# Altium PCB MiniPCBR2.PcbDoc (part 2 of 2)
Units mil, origin at the board's own origin, x right, y up, seen from the top; angles counter-clockwise.
Board outline 669.97 x 965.45 mil, 4 copper layers (Top Layer, GND, PWR, Bottom Layer), stack 30.2 mil thick; 95 components, 51 nets, 371 pads, 97 vias.
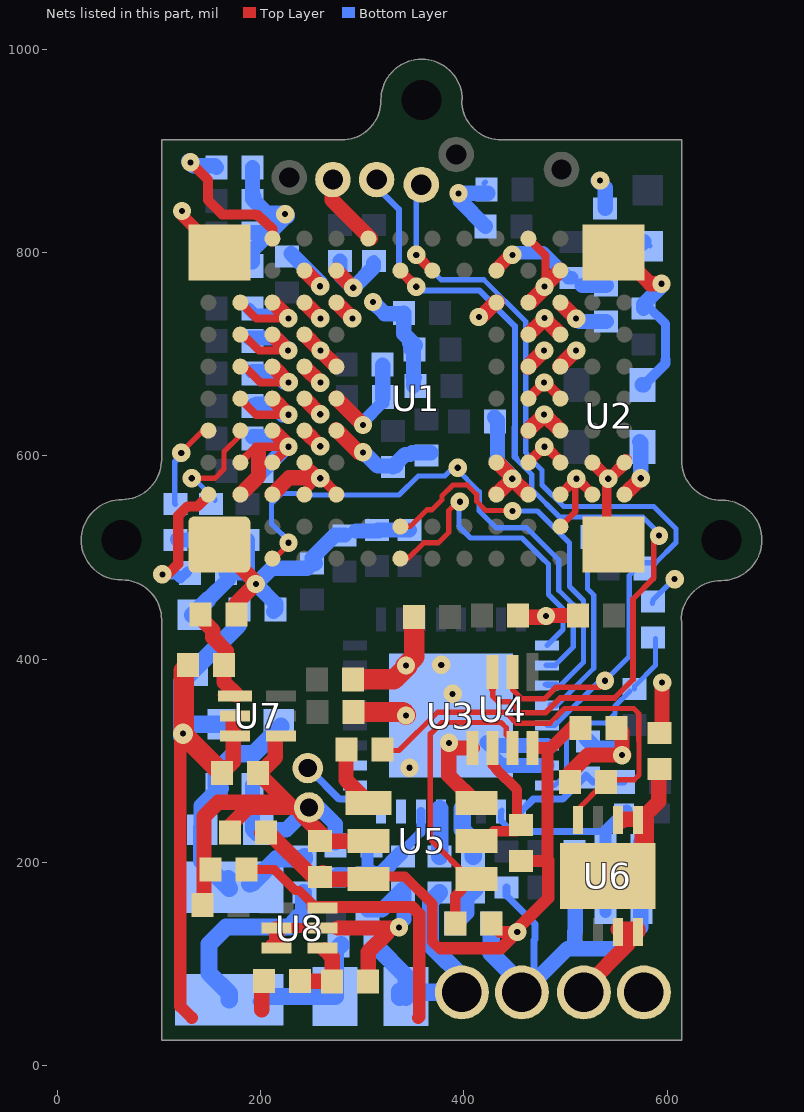
[diagram p4: the nets of this part, all layers, seen from the top]

## Via types
v1: diameter 18, hole 6, Top Layer to Bottom Layer, tented both sides, 96 vias
v2: diameter 20, hole 6, Top Layer to Bottom Layer, tented both sides, 1 vias

## Nets (pads, with @x,y where several pads share a name; then routed paths per layer and width w, separated by ;. In a path a pad name is that pad's centre, name@x,y a point inside that pad or via, vN(x,y) a via of type N, cw(c..) or ccw(c..) an arc to the next point about the centre after c; other vN are vias at no path point) (continued)
GND: C1.0 C2.0 C3.0 C4.0 C5.0 C6.0 C7.0 C8.0 C9.0 C10.0 C11.0 C12.0 C13.1 C14.1 C15.1 C16.1 C17.1 C18.1 C19.0 C20.1 C21.1 C22.1 C23.1 C24.1 C25.1 C26.1 C27.1 C28.1 C29.1 C30.1 C31.1 C32.1 C35.1 C36.0 C37.1 C38.1 C39.1 C40.1 C41.1 C42.0 C43.1 C44.1 C45.1 C46.0 C47.0 C48.0 C49.0 C50.0 C51.0 C52.1 C53.1 C54.1 C55.1 C56.1 C57.1 C58.0 C59.1 C60.1 C61.1 C62.1 J1.1 pad.1@271,872 pad.3@247.5,254 R2.1 R5.0 R11.0 R12.0 R15.0 U1.1-A1 U1.9-A11 U1.10-B3 U1.11-B4 U1.13-B6 U1.14-B7 U1.15-B8 U1.16-B9 U1.19-C3 U1.20-C4 U1.21-C5 U1.22-C6 U1.23-C7 U1.24-C8 U1.25-C9 U1.30-D3 U1.31-D4 U1.32-D5 U1.33-D6 U1.34-D7 U1.35-D8 U1.36-D9 U1.37-D10 U1.41-E3 U1.43-E5 U1.44-E6 U1.45-E7 U1.47-E9 U1.48-E10 U1.54-F11 U1.68-K3 U1.69-K4 U1.74-K9 U1.79-L3 U1.80-L4 U1.81-L5 U1.82-L6 U1.83-L7 U1.84-L8 U1.85-L9 U1.87-L11 U1.89-M2 U1.90-M3 U1.91-M4 U1.92-M5 U1.93-M6 U1.94-M7 U1.95-M8 U1.96-M9 U1.97-M10 U1.99-N3 U1.100-N4 U1.106-P1 U1.108-P4 U1.114-P11 U2.2 U3.6 U3.7 U3.33 U4.5 U5.2 U5.6 U7.4 U8.2 U8.3 U8.5 | length 5359.1
  Top Layer w5.12: U1.14-B7@179.89,687.65 U1.14-B7@179.89,687.99 ; U1.24-C8@211.38,719.49 U1.24-C8@212.22,719.49 ; v1@225.94,703.94 v1@226,704 ; U1.34-D7@242.88,687.83 U1.34-D7@242.88,687.99 ; v1@257.47,642.04 v1@258.81,642.04 ; v1@258.44,609.45 v1@258.66,609.45 ; U1.45-E7@274,687 U1.45-E7@274,688.37 ; U1.45-E7@274.37,687.99 U1.45-E7@275,687.99 ; v1@300.38,630.5 v1(300.5,630.5) ; v1@479.8,734.54 v1@479.8,736.98 ; v1@511.54,734.31 v1@512.56,734.31
  Top Layer w6: U1.89-M2@494.85,530.51 509.5,545.16 509.5,576.5 v1@509.5,581.2
  Top Layer w8: U1.1-A1@175.86,527.18 U1.1-A1@179.89,531.21 ; U1.11-B4@179,593 195,609 v1@227.32,609 ; U1.13-B6@179,657 195.47,640.53 v1(227.35,640.53) ; U1.16-B9@180,751 195.57,735.43 v1(227.17,735.43) ; U1.14-B7@182,690 199.56,672.44 v1(227.39,672.44) ; U1.15-B8@183,719 198.17,703.83 v1(226.89,703.83) ; U1.30-D3@242.88,562.01 242.88,564.48 v1@256.9,578.5 ; v1@446.9,577.06 v1@446.9,578.1 ; U1.87-L11@463.35,813.98 480.23,797.11 480.23,775.27 480,775.04 v1@480,769
  Top Layer w9: v1@542.2,578.5 542.2,576.45 540.47,574.72 540.47,519.35 U1.106-P1@547.01,512.8 ; U1.106-P1@545.8,514.5 U1.106-P1@565.42,494.88
  Top Layer w10: U8.3@209,119 215.62,119 U8.3@216,119 ; U1.20-C4@211.38,593.51 212,593.51 v1@229.57,611.08 ; U8.3@215.62,115.61 217,116.99 U8.2@217,135.3 ; U8.2@215.62,135.3 U8.2@217,135.3 ; U1.31-D4@242,595 242,594.5 258,578.5 v1(258.5,578) ; v1@259.4,578.5 274.37,563.53 U1.41-E3@274.37,562.01 ; 276,135 275.7,135.3 U8.5@260.9,135.3 U8.2@217,135.3 ; 325.5,130.7 325.93,130.27 ; U1.82-L6@463,656 463,656.38 v1(478.91,672.29) ; U1.80-L4@463.35,593.51 477,607.16 v1@477,609.5 ; v1(479.07,609.07) 480.93,609.07 U1.91-M4@496,594 ; v1@479.5,673 494.85,657.65 U1.93-M6@494.85,656.5 ; U1.90-M3@494.85,562.01 495.01,562.01 v1@509.5,576.5 ; U1.90-M3@495.5,563 U1.90-M3@495.5,563.5 ; v1(510.56,577.57) 511.43,577.57 U1.99-N3@527,562 ; U1.114-P11@546.8,800.2 U1.114-P11@547.01,800.2
  Top Layer w11.81: v1@120.95,842.07 120.95,838.47 U1.9-A11@159.22,800.2 ; U1.11-B4@179.89,593.34 U1.11-B4@179.89,593.51 ; U1.100-N4@526.34,593.51 v1@541.78,578.08 ; v1@543.1,577.6 559.5,594 U1.108-P4@559.5,596
  Top Layer w15: C46.0@141.8,155 143.98,157.18 143.98,245.08 158,259.1 219.1,259.1 ; U1.1-A1@159.51,511.07 195.09,475.49 v1@195.09,474.34 ; C39.1@169.63,229.6 169.63,235.98 187.65,254 ; C40.1@176.12,444 176.12,455.37 v1@195.09,474.34 ; U1.10-B3@179.89,562.01 197.84,579.96 197.84,605.29 ; 191.3,257.65 187.65,254 ; v1(195.09,473.99) v1@195.09,474.34 ; C41.1@197.22,288 C41.1@198.11,287.11 ; U1.23-C7@211,688 211.83,688 v1(227.39,672.44) ; U1.19-C3@211.38,562.01 227.87,578.5 256.9,578.5 258,578.5 259.4,578.5 v1@259.88,578.5 ; U1.21-C5@212,625 227.35,609.65 v1(227.35,609.03) ; U1.22-C6@212,656 212,655.89 v1(227.35,640.53) ; U1.24-C8@212,719 212,718.72 v1(226.89,703.83) ; U1.25-C9@212,751 227.17,735.83 v1(227.17,735.43) ; U7.4@214.34,320 214.34,303.34 C41.1@198.11,287.11 ; U8.3@215.62,119 215.62,133.62 216.99,134.99 U8.2@215.62,134.99 ; pad.3@239.7,247.7 264.98,222.42 C38.1@261.5,222.42 ; U1.35-D8@242.88,719.49 257.38,705 258,705 258,704.37 274,688.37 U1.45-E7@274.37,687.99 ; U1.32-D5@243,625 v1(258.5,609.5) ; U1.34-D7@243,687 243.71,687 v1(258.62,672.09) ; U1.36-D9@243,751 243.1,751 v1(258.66,735.44) ; U1.37-D10@243,782 243.52,782 v1(258.46,767.06) ; U1.33-D6@244,656 244,655.5 257.47,642.04 v1(258.5,641) ; pad.3@250,258 246,254 231.22,254 ; C38.1@267.4,220.2 268,220.8 U5.2@305.9,220.8 ; pad.1@271,872 270,852 U1.54-F11@308,814 ; U1.43-E5@274,626 296.5,603.5 v1(300.5,603.5) ; U1.44-E6@274,657 v1(300.5,630.5) ; U1.47-E9@274,751 274.59,751 v1(290.15,735.44) ; U1.48-E10@274,783 274,782.5 v1(291,765.5) ; 275.7,135.3 337.3,135.3 337.5,135.5 v1@337.5,136 ; C43.1@305.72,82.5 305.72,111.72 324.6,130.6 ; v1@385,317 385,285.4 U5.6@412.2,258.2 ; v1@385.2,312.6 U4.5@408.43,312.6 ; v1(414.66,736.72) 416.72,736.72 431.37,751.37 U1.74-K9@433,751.37 ; U1.68-K3@431,563 433,563 v1(447.5,577.5) U1.79-L3@463,562 ; U1.69-K4@431.85,593.51 432.89,593.51 v1@447.8,578.6 ; C6.0@453.02,441.3 482.3,441.3 484,443 C5.0@512.28,443 ; U1.81-L5@463,624 463,624.87 v1@478.13,640 ; U1.83-L7@463,687 463,687.87 v1(478.91,703.78) ; U1.84-L8@463.35,719.49 463.49,719.49 v1@477.5,733.5 ; U1.85-L9@463.35,750.99 464.99,750.99 v1@479.94,765.94 ; v1(478.86,640.73) v1@478.13,640 ; v1(479.23,766.65) 479.23,767.23 U1.97-M10@495,783 ; v1@481,734 481,733.35 U1.95-M8@494.85,719.49 ; U1.94-M7@494,688 509.78,703.78 v1(510.41,703.78) ; U1.92-M5@494.85,625 479.86,640 v1@478.13,640 ; U1.96-M9@495,751 495,750.55 v1(510.42,735.13) ; R11.0@504.48,279.1 504.48,288.11 522.12,305.75 v1@555.5,305.75 ; C37.1@549.52,334.4 555.5,328.42 v1@555.5,305.75 ; U1.114-P11@553.85,799 583.35,769.5 v1(594.5,769.5) ; v1@557.24,305.75 v1@555.5,305.75 ; v1(595,377) 595,330.04 R12.0@596.2,328.84 ; 187.65,254 231.22,254 ; C41.1@198.11,287.11 231.22,254
  Top Layer w20: C45.1@290.82,380.2 331.2,380.2 v1@344,393 ; C44.1@291.22,348 340,348 v1@343,345 ; v1@342,393 351.08,402.08 C36.0@351.08,441
  Bottom Layer w5: R5.0@585.59,454.87 R5.0@585.59,456.26 ; R5.0@586,456.72 586,458.15 v1@604.67,476.82
  Bottom Layer w5.12: v1@298,630 v1@300,630 ; C57.1@419.68,868.07 C57.1@421.12,869.5
  Bottom Layer w7: C27.1@442,167.36 469.9,139.46 469.9,124.25 469,123.35 469,91 J1.1@465,87
  Bottom Layer w8: v1@222.81,838.19 v1@223,838 ; v1@223.43,838 v1(224,838) ; C27.1@442,167.36 C27.1@442,175.28
  Bottom Layer w9: C58.0@580.88,747.47 598.5,729.85 598.5,694.79
  Bottom Layer w10: v1@257.5,608.5 v1(258.5,609.5) v1@259.45,610.45 ; v1@300,630 v1(300.5,630.5) ; v1@310,748.5 v1@310,754.5 ; C17.1@310.28,791.78 C17.1@311.5,793 ; C54.1@321.72,651.72 C54.1@321.72,660 ; U2.2@577.29,670.05 598.5,691.26 598.5,694.79
  Bottom Layer w11.81: C55.1@344.9,710.7 350.08,705.52 C55.1@350.48,705.12
  Bottom Layer w12: C50.0@188,745 193.79,739.21 223.39,739.21 v1(227.17,735.43) ; C49.0@191.72,649 191.72,650.72 C49.0@192,651 ; v1@300,633 320.32,653.32 C54.1@320.32,658.1
  Bottom Layer w15: C2.0@118,518 118.72,517.28 C3.0@151,517.28 ; C61.1@147.5,458 168,478.5 C1.0@168,485 ; C3.0@152,517 152.28,517.28 C47.0@187,517.28 187,483.02 185.02,485 C1.0@168,485 ; C1.0@165.72,485 C1.0@168,485 ; C11.0@189,716 214.72,716 226.86,703.86 v1@228,705 ; C8.0@190,820 208,820 224,836 v1(224,838) ; C60.1@191.72,276 191.72,232.28 C59.1@196,228 ; C48.0@191.72,791 191.72,802.42 v1@225.3,836 ; C12.0@191.72,853 205.72,839 v1@225,839 ; C4.0@191.72,884 191.72,856.28 C12.0@193,855 ; C9.0@192,619 209,619 v1@218.97,609.03 ; C51.0@192,683 213,683 223.56,672.44 v1(227.39,672.44) ; v1@192.15,473.31 v1@195.09,473.31 ; v1@194.05,475.13 v1(195.09,473.99) ; C49.0@196,651 211,651 221.47,640.53 v1(227.35,640.53) ; C59.1@197.5,232 225,232 pad.3@247,254 ; C7.0@201.72,585 225.83,609.11 v1@227.23,609.11 ; C62.1@212.64,446.92 C62.1@214.72,449 214.72,454.46 v1(195.09,473.99) ; v1@224.4,837.35 v1@225.95,835.8 ; v1@227.23,609.03 v1(227.35,609.03) ; C10.0@229.75,799.25 258.46,770.54 v1(258.46,767.06) ; pad.3@249,257 pad.3@250.28,255.72 ; C21.1@250.4,493.92 C21.1@250.4,494 ; C21.1@252.79,493.77 C21.1@253.5,494.48 ; pad.3@254,257 273.28,237.72 C32.1@273.28,219 ; C56.1@278,791.78 278,778 v1@292,764 ; C20.1@282.85,522.22 273.11,522.22 250.4,499.51 C21.1@250.4,494 ; v1(291,765.5) 311,785.5 C17.1@311,790 ; C20.1@293.58,526.15 C22.1@316.2,526.15 ; v1@299.4,631.4 v1@301.4,631.4 ; v1(300.5,603.5) 301.5,603.5 315,590 C13.1@330.72,590 ; C31.1@305,153.28 319.28,153.28 C30.1@339,173 ; v1(310.5,751.5) 322,740 C16.1@338,740 ; C22.1@315.22,527.12 C23.1@346.3,527.12 ; C15.1@319.72,689.3 320,689.02 C54.1@320,657 ; C13.1@330,589.28 C13.1@330.72,590 ; C13.1@332.86,590.04 332.82,590 C13.1@330.72,590 ; C16.1@340.78,740.7 340.78,720.22 C55.1@352,709 ; 341,144 C30.1@341,174 ; C55.1@348,705 350.28,702.72 C14.1@350.28,677.72 ; C14.1@350.08,677.92 C14.1@350.28,677.72 ; C55.1@350.08,705.52 C55.1@350.08,709.6 ; C14.1@350.28,669 C14.1@350.28,677.72 ; C14.1@351,677 C14.1@350.28,677.72 ; C52.1@367.33,603.23 348.83,603.23 346.99,601.39 342.11,601.39 C13.1@330.72,590 ; v1(394.5,858.5) v1@396,858.5 ; C18.1@421.28,826 396,851.28 v1@396,858.5 ; U3.33@423,318 426.06,314.94 U3.6@481.61,314.94 ; C57.1@423.5,858.5 v1@396,858.5 ; C53.1@430,638 432.92,635.08 432.92,596.7 431.67,595.45 448,579.12 v1@448,578 ; U3.33@431,301 436.74,295.26 U3.7@481.61,295.26 ; J1.1@456,77 J1.1@457,77 ; J1.1@469.42,82.58 501.85,115 553,115 574,136 C24.1@574,220 ; C28.1@508.72,210 509.5,209.22 509.5,132.09 508.72,131.31 508.72,120.28 512,117 ; v1@513.72,732.28 C19.0@540,732.28 ; C35.1@520,322 529.39,312.61 548.39,312.61 v1(555.5,305.5) ; v1@532,871 539,864 R15.0@539,843.72 ; U2.2@575.5,670.05 U2.2@577.29,670.05 ; C58.0@576.77,745.28 576.77,749.27 v1@595.5,768 ; v1(195.09,473.99) 210.46,489.36 245.76,489.36 C21.1@250.4,494
  Bottom Layer w17: C61.1@133,443.5 C61.1@147.5,458 ; R2.1@426.72,140 426.72,110.28 J1.1@457,80
  other v1: 336,136 346.35,293.08 385.2,317.6 342.91,344.49 388.85,365.84 342.91,393.7 377.63,394.41 480.8,442.5 607.38,478.69 542,577.5 258.76,703.75 479.23,735.65 122.5,841 534,871
HORISYNC: U1.55-G1 U3.1 | length 313.9
  Top Layer w5.12: U1.55-G1@337.37,499.02 344.89,499.02 360.32,514.46 374.63,514.46 384.93,524.76 384.93,546.33 v1@394.49,555.89
  Bottom Layer w5.12: v1@395.21,555.37 395.21,530.42 406.41,519.22 457.21,519.22 476.79,499.65 483.1,493.34 483.1,463.62 497.36,449.36 497.36,429.11 U3.1@481.61,413.37
  other v1: 395.92,554.94
NetC1_1: C1.1 U1.2-A3 | length 137.7
  Top Layer w7: U1.2-A3@146.88,560.5 U1.2-A3@148.39,562.01
  Top Layer w10: v1(103.1,483.42) 108.39,483.42 118.71,493.74 118.71,541.28 127.8,550.36 137.82,550.36 U1.2-A3@149.24,561.78
  Bottom Layer w10: v1(103.1,483.42) 116.8,483.42 120.88,479.34 C1.1@127.7,486.16
NetC2_1: C2.1 U1.4-A5 | length 92.1
  Top Layer w5.5: v1@120,602 143,625 U1.4-A5@148.39,625
  Bottom Layer w5.5: C2.1@116,552.72 115.32,553.4 115.32,594.32 v1@124,603
  other v1: 121.7,603
NetC3_1: C3.1 U1.12-B5 | length 106.9
  Top Layer w5.12: v1@133.08,578.08 154.78,578.08 163.83,587.12 163.83,604.3 179.89,620.37 U1.12-B5@179.89,625
  Bottom Layer w5.12: v1@136,576 155,557 C3.1@155,556
  other v1: 132.07,578
NetC4_1: C4.1 U1.27-C11 | length 164.5
  Top Layer w5.12: U1.27-C11@211.38,813.98 U1.27-C11@211.38,816.8
  Top Layer w10: v1(130.74,888.97) 148,871.71 148,851.76 162,837.76 193.87,837.76 194.64,837 197,837 211.38,823.62 U1.27-C11@211.38,813.98 211.38,811.38 U1.27-C11@211,811
  Bottom Layer w15: v1@129,890 133.5,885.5 154.78,885.5 C4.1@156.28,884
NetC19_1: C19.1 R1.0 U1.75-K10 | length 111.7
  Top Layer w13: U1.75-K10@431,783 445.9,797.9 v1(447.6,797.9)
  Bottom Layer w13: v1@451,800 477.82,800 502.53,775.28 R1.0@506,775.28
  Bottom Layer w15: R1.0@516.28,767.72 C19.1@540,767.72
NetC24_0: C24.0 C25.0 C26.0 L1.2 U3.10 | length 229
  Bottom Layer w5.12: U3.10@437.3,249.98 U3.10@437.3,251.3
  Bottom Layer w6: U3.10@436.34,249.98 436.34,241.62 447.79,230.17 468.17,230.17
  Bottom Layer w7: 465.11,230.31 539.28,230.31
  Bottom Layer w12: C26.0@539.28,151 C25.0@539.28,183 C24.0@539.28,216 539.28,230.28 L1.2@560,251
NetC30_0: C30.0 C31.0 C32.0 L2.1 U3.14 | length 159
  Bottom Layer w9: C31.0@307,190 C31.0@308.72,191.72 ; C30.0@339,211 357.6,229.6 U3.14@357.6,249.98
  Bottom Layer w12: L2.1@275.28,188.72 305,188.72 305,215 C32.0@310,220 ; C31.0@307,187 308.72,188.72 C31.0@308.72,191.72
  Bottom Layer w15: C31.0@305,188.72 308.72,188.72 317.72,188.72 C30.0@338,209
NetC33_0: C33.0 U3.13 | length 52.5
  Bottom Layer w10: 377.1,234.81 U3.13@377.1,238.8
  Bottom Layer w17: C33.0@376,205.72 376.02,252.47 376.23,252.69 U3.13@376.23,251.24
NetC33_1: C33.1 J1.0 L3.1 R16.0 | length 229.3
  Bottom Layer w17: R16.0@313,118 342.84,88.16 L3.1@342.84,68 L3.1@342.84,67 ; L3.1@336.84,67 L3.1@336.84,73.16 ; L3.1@344,75 347,72 J1.0@397.94,72 ; C33.1@376,170.28 366.96,161.24 366.96,119.04 J1.0@402,84
NetC34_0: C34.0 U3.12 | length 51.7
  Bottom Layer w17: U3.12@398.23,253 398.23,232.31 409,221.54 C34.0@409,205.72
NetC34_1: C34.1 R2.0 | length 42.2
  Bottom Layer w17: R2.0@391.28,140 402,150.72 402,165 C34.1@411,174
NetC35_0: C35.0 R3.1 U3.9 | length 119.3
  Bottom Layer w7: U3.9@456.02,249.98 468.19,262.15 496.95,262.15 C35.0@520.4,285.6 ; C35.0@520,286 C35.0@520.4,285.6 ; R3.1@557.28,279 527,279 C35.0@520.4,285.6
NetC40_0: C40.0 R13.0 U7.1 | length 91.4
  Top Layer w5: U7.1@160,364.5 172.68,364.5 U7.1@173,364.18
  Top Layer w15: C40.0@139,442 152.79,428.21 152.79,421.21 166,408 ; R13.0@163.72,393 163.72,377.28 U7.1@176,365
NetC43_0: C43.0 R14.0 U8.4 | length 68.1
  Top Layer w5: R14.0@238.72,85.5 R14.0@241.22,83
  Top Layer w10: R14.0@238.72,83 R14.0@241.22,83
  Top Layer w15: R14.0@241.22,83 C43.0@266,83 ; U8.4@263,114 270.28,106.72 C43.0@270.28,83 ; C43.0@270.28,82.5 C43.0@270.28,83 ; C43.0@273,83 C43.0@270.28,83
NetC59_0: C59.0 C60.0 L4.2 L5.1 R17.1 | length 299.8
  Bottom Layer w17: C59.0@142,234 142,201.31 L4.2@169,174.31 ; C59.0@142.5,232 142.5,255.5 C60.0@160,273 ; C60.0@156.28,276 156.28,289.28 174,307 193,307 L5.1@220,334 ; L4.2@164,180 L4.2@168,184 ; L4.2@189,179 L4.2@200.72,190.72 ; L4.2@192,180 215.5,203.5 243,203.5 R17.1@243,205.72
NetD1_C: D1.C R15.1 | length 55.9
  Bottom Layer w5.12: D1.C@572.72,817.28 D1.C@582,808 ; D1.C@578.72,809.28 D1.C@579,809 ; D1.C@580.72,808.78 D1.C@583,806.5
  Bottom Layer w15: R15.1@539,808.28 574.28,808.28 D1.C@577,811
NetJ2_1: J2.1 U6.7 U6.8 | length 100.7
  Top Layer w15: J2.1@518,76 562,120 562,124.93 U6.8@569.86,132.79 ; U6.7@551.7,134.14 568.52,134.14 U6.8@569.86,132.79 ; U6.8@571.12,131.54 U6.8@569.86,132.79 ; U6.8@571.21,134.14 U6.8@569.86,132.79
NetL3_2: L3.2 L4.1 R16.1 R17.0 | length 318.8
  Bottom Layer w10: L4.1@197,63 L4.1@201,67
  Bottom Layer w17: L4.1@169,64.69 169,71 149,91 149,119.42 166,136.42 228.14,136.42 236.04,144.33 236.04,145.04 242,151 R17.0@242,170 ; L4.1@202,68 L3.2@273.16,68 273.16,113.16 R16.1@279,119
NetR4_0: R4.0 R5.1 U3.8 | length 209.2
  Bottom Layer w5: U3.8@481.61,275.57 489.27,275.57 500.93,287.23 500.93,321.16 502.69,322.92 502.69,333.74 505.99,337.04 539.8,337.04 548.69,345.94 548.69,353.78 R4.0@563.55,368.64 ; R4.0@568,370.72 568,373.33 588.37,393.7 R5.1@588.37,420.16
NetR6_0: pad.3@358,867 R6.0 U1.60-H10 U3.5 U4.2 | length 918.6
  Top Layer w5.5: U4.2@447.8,387.4 447.8,369.98 456.83,360.95 479.1,360.95 490.44,372.29 v1@532.93,372.29
  Top Layer w10: v1(353.01,797.91) 369,781.93 U1.60-H10@369,780
  Bottom Layer w5.12: pad.3@351,867 353.01,864.99 v1(353.01,797.91) 377.5,773.43 419.5,773.43 460.7,732.23 460.7,603.27 462.08,601.89 462.08,600.65 476.83,585.9 476.83,571.48 498.19,550.12 586.82,550.12 608.57,528.37 608.57,514.65 588.75,494.83 R6.0@572.02,494.83 ; U3.5@481.61,334.63 489.35,334.63 535.25,380.53 v1@538.84,380.53 ; v1(538.84,378.69) 562.66,402.51 562.66,482.15 R6.0@572.02,491.51
NetR7_0: pad.2 R7.0 U1.56-G10 U3.4 U4.3 | length 1110.7
  Top Layer w5.12: U1.56-G10@337.37,782.48 U1.56-G10@338.52,782.48
  Top Layer w5.5: 428.11,370 428.11,363.89 433.97,358.03 444.9,358.03 455.73,347.2 480.2,347.2 494.79,361.79 548.22,361.79 566.33,379.9 566.33,459.35 586.8,479.82 v1@586.8,521.72
  Top Layer w7: 428.11,370 U4.3@428.11,387.4
  Top Layer w10: U1.56-G10@338,782 338,781.5 v1(353,766.5)
  Bottom Layer w5.12: 450.38,598.04 466.71,581.71 466.71,567.29 494,540 532,540 ; U3.4@484.65,355.12 U3.4@485.83,355.12 ; U3.4@485.23,354.01 490.74,354.01 527.71,390.98 527.71,463.27 521.71,469.27 R7.0@521.71,512.19 ; R7.0@522.48,515.84 R7.0@523.9,514.42 ; R7.0@525.28,524.51 525.28,533.28 532,540 ; R7.0@529,519 R7.0@529.74,518.26 ; v1@593.95,522 575.95,540 532,540
  Bottom Layer w6: pad.2@307,872 336,843 336,783 v1@352,767 ; v1(353,766.5) 356.63,762.87 415.13,762.87 450.14,727.86 450.14,628.68 449.94,628.47 449.94,599.1 451.52,597.52
  other v1: 592.01,521.51
NetR8_0: R8.0 U4.6 U5.5 | length 131.6
  Top Layer w5.91: U5.5@397.9,220.8 U5.5@412.2,220.8 ; U4.6@428.11,312.6 U4.6@428.11,314.77 ; U4.6@428.2,298.31 U4.6@428.2,310.4
  Top Layer w10: U4.6@428,296 431.89,292.11 431.89,291.72 452.3,271.32 452.3,243.7 R8.0@459,237 ; U5.5@429.3,230.6 451.88,230.6 R8.0@458,236.72
NetR9_0: R9.0 U4.7 U5.4 | length 324.8
  Top Layer w5.12: 378,337.6 436.44,337.6 441.58,332.46 441.58,325.22 U4.7@450.2,316.6 ; U4.7@447.4,300 U4.7@447.8,299.6 ; U4.7@447.43,326.77 448.43,326.77 U4.7@451.1,324.1 ; U4.7@447.8,312.6 U4.7@447.8,299.6 ; U4.7@448.2,299.2 U4.7@447.8,299.6
  Top Layer w5.5: 378,337.33 366.98,326.31 366.98,222.57 U5.4@406.16,183.4 ; R9.0@386.28,139 R9.0@386.28,139.6
  Top Layer w10: R9.0@391.43,139.6 391.43,166.63 U5.4@404.45,179.65
NetR10_0: R10.0 U5.1 | length 49.8
  Top Layer w15: R10.0@283.98,299.7 283.98,281.02 U5.1@306,259
NetR10_1: R10.1 R11.1 U6.4 | length 432.1
  Top Layer w5.12: R10.1@312,310 336.09,310 373.81,347.72 440.63,347.72 448.44,339.91 451.46,336.89 484.47,336.89 499.06,351.48 567.13,351.48 572.02,346.59 ; U6.4@512.06,241.78 512.06,252.27 R11.1@536.82,277.03 ; R11.1@538.72,275.12 544.9,281.3 567.5,281.3 572.3,286.1 572.3,319 572.01,319.29 572.01,346.29
NetR12_1: R12.1 U6.1 U6.2 U6.9 | length 183.6
  Top Layer w11.81: U6.9@549.84,187.12 U6.9@555.83,193.1 ; U6.9@566.5,201.5 U6.9@571.87,206.87 ; U6.1@572,244.5 U6.1@575,247.5 ; U6.9@580.5,192 581,192.5 581,242.5
  Top Layer w15: U6.2@556,241 557.5,242.5 U6.1@574.5,242.5 ; U6.1@574,242 U6.1@574.5,242.5 ; U6.9@576,210 575.18,210.82 575.18,242.5 U6.1@574.5,242.5 ; R12.1@592.82,294.15 591.8,293.13 591.8,259.8 U6.1@574.5,242.5
NetU1_107-P3: U1.107-P3 U2.3 | length 61.5
  Top Layer w7.87: U1.107-P3@557.84,562.01 U1.107-P3@558.01,562.01
  Top Layer w15: U1.107-P3@558.01,562.01 v1(574,578)
  Bottom Layer w7.87: v1@574,579.94 v1@575.59,578.35
  Bottom Layer w15: U2.3@573,614 574,613 574,579.94 v1(574,578)
NetU3_15: U3.15
NetU3_16: pad.3@246.16,292.75 U3.16 | length 91.2
  Bottom Layer w7: pad.3@249.2,295.7 249.2,290.26 277.31,262.15 291.52,262.15 303.68,249.98 U3.16@318.23,249.98
NetU3_17: U3.17
NetU3_18: U3.18
PIXCLK: U1.56-G2 U3.3 | length 401.3
  Top Layer w5.12: U1.56-G2@337.37,530.51 347.04,530.51 363.64,547.12 368.63,547.12 378.33,556.82 378.33,560.77 389.06,571.5 401.76,571.5 ; 402.67,571.61 412.48,561.8 412.48,555.37 421.48,546.37 v1@449.29,546.37
  Bottom Layer w5.12: v1(447.7,545.9) 472.34,545.9 503.88,514.36 503.88,471.46 517.6,457.74 ; U3.3@479.83,375.02 U3.3@490.37,375.02 ; U3.3@481.25,375.46 U3.3@490.81,375.46 ; U3.3@481.61,374 494.69,374 517.6,396.91 517.6,456.6
V5P0: C37.0 C38.0 C39.0 C41.0 C42.1 C61.0 C62.0 J2.0 L5.2 R8.1 R9.1 R13.1 R14.1 U4.8 U5.3 U7.2 U7.3 U8.6 | length 1606.9
  Top Layer w7: v1@455.1,130.3 v1@457.8,133
  Top Layer w9: C42.1@186,194 187.05,192.95 213.35,192.95 234,172.3 237.7,172.3 U8.6@252,158
  Top Layer w10: C38.0@261.9,189.9 C38.0@263.16,188.64 ; U5.3@301.85,185.9 341.95,185.9 368.7,159.15 368.7,122 376.55,114.15
  Top Layer w12: v2@120.76,324.81 120.76,58.24 132,47 ; U8.6@251,156 349,156 356,149 356,48 355,47 ; 377.2,115.45 436.35,115.45 v1(452.4,131.5) 435.5,131.5 R9.1@425,142 ; v1@451,133 483,165 483,202 482.28,201.28 ; R8.1@458,201.28 482.28,201.28 ; U4.8@467.49,312.6 482.28,312.6 ; C37.0@509.42,336.55 485.47,312.6 482.28,312.6 ; 482.28,201.28 482.28,312.6
  Top Layer w15: C41.0@161.78,288 161.78,287.78 173,299 U7.2@173,342 ; 201,55 201,81 R14.1@204,84 ; C39.0@201,229 C39.0@208.2,229 ; C39.0@205.3,231.9 C39.0@208.2,229 ; R14.1@205.5,87 R14.1@206.5,86 ; C39.0@209,229 C39.0@208.2,229 ; C38.0@258.45,186.78 250.42,186.78 C39.0@208.2,229 ; C38.0@260.9,189.9 260.9,184.1 261.6,183.4 U5.3@305.9,183.4
  Top Layer w20: v2@124.1,329.1 124.1,388.82 R13.1@128.28,393 ; v2@127.05,322.73 C41.0@161.78,288
  Bottom Layer w17: v2@122,324 122,377.5 C61.0@133,388.5 178,433.5 C62.0@178,451 ; 132,336 L5.2@162.5,336
  other v2: 123.5,326.65
VERTSYNC: U1.17-C1 U3.2 | length 547.3
  Top Layer w5.12: U1.17-C1@211.38,499.02 213.37,499.02 v1@225.86,511.51
  Bottom Layer w5.12: v1@230.19,513.76 210.62,533.33 210.62,553.26 220.32,562.96 239.23,562.96 240.75,561.44 336.11,561.44 354.91,580.24 368.63,580.24 381,580.24 v1@390,589.24 ; v1(393.87,588.39) 391.51,588.39 415.1,564.8 415.1,546.13 ; 416.19,544.58 431.43,529.34 461.4,529.34 480.98,509.77 493.21,497.55 493.21,467.81 507.48,453.55 507.48,411.81 496.56,400.89 489.73,394.06 U3.2@480.62,394.06 ; U3.2@481.61,393.68 U3.2@489.35,393.68
  other v1: 227.27,514.55
pads on no net: U1.18-C2 U1.26-C10 U1.49-E11 U1.53-F10 U1.61-H11 U1.65-J11 U1.76-K11 U1.77-L1 U1.78-L2 U1.86-L10 U1.101-N5 U1.102-N6 U1.103-N7 U1.104-N8 U1.105-N9 U1.109-P5 U1.110-P6 U1.111-P7 U1.112-P8 U1.113-P9 U6.3 U6.5 U6.6
copper on no net: | length 41.5
  Top Layer w5.12: 368.86,813.98 383.15,799.7 v1@383.15,798.08 ; v1@449.36,768.68 449.55,768.68 463.35,782.48
  other v1: 448.8,768.45 384.69,798.01

## Polygon pours and split planes (outlines as drawn)
"1.8V VDD" on PWR "1.8V" (solid, remove dead copper, pour order 140): 595.9,901.5 605.6,891.8 605.1,891.3 605.1,575.6 628.1,552.6 628.1,481.8 607.6,461.3 607.6,110.6 605.8,108.8 586.6,108.8 559.8,135.6 342.3,135.6 325.4,118.7 161.2,99 161.2,142.6 161.2,294.1 169.5,302.4 346.4,302.4 346.4,570.1 436.9,570.3 507.1,640.5 507.1,844.8 472.9,879 472.9,901.5
"1.2V VDD" on PWR "1.2V" (solid, remove dead copper, pour order 130): 209,308.5 336.1,308.5 336.1,495.15 336.1,501 336.1,580 326,580 376.21,580 497.22,633.4 497.22,833.78 457.5,902.5 414,902.5 396.5,920 323.5,920 300.5,897 242,897 242,819.5 241.5,819 175,819 175,395.5 209,395.5
"2.9V VDD" on PWR "2.9V" (solid, remove dead copper, pour order 128): 110,347.5 204.5,347.5 204.5,392.5 168,392.5 167.5,393 167.5,823 237.5,823 237.5,905 108.5,905 108,904.5 109.5,903 109.5,575 107.5,575 87,554.5 87,481.5 88,481.5 111,458.5 110,457.5
V5P0 on PWR "5V" (solid, remove dead copper, pour order 114): 157.5,345 157.5,93.54 328.47,111.29 364.5,130.15 560.07,130.15 610.97,44 110,44 109.5,44.5 109.5,345
GND on GND "GND" (solid, remove dead copper, pour order 108): 303,906 328,931 393,931 418,906 598,906 609,895 609,574 630,553 630,480 609,459 609,44 108,44 108,457 85,480 85,555 107,577 107,906

## Keep-outs
Keep-Out Layer:
  lines w1: 191,906 303,906 360.5,963.5 418,906 598,906 609,895 609,593 609,576 616.25,568.75 624.75,560.25 630,555 630,480 610,460 610,30 108,30 108,457 85,480 85,555 102,572 107,577 107,905.82 194.82,905.82 195,906

## Other copper
Top Layer:
  region net GND: 592,569.5 602,559.5 602,536.5 562,536.5 562,539.5
  region net GND: 525,895 600,895 603,892 603,574 603,537 597,537 585,603.26 585,835 525,835
  region net V5P0: 115,60 115,37 361,37 361,60

## Silkscreen, mask and mechanical layers (free items; w line width, h text height)
Top Overlay:
  circle w5: c575.93,268.19 r3
  circle w10: c487.83,396.38 r4.47
  circle w10: c101.6,507.3 r5.86
  circle w10: c120.5,245 r3.49
  circle w10: c121,83 r4.47
  circle w10: c601,898 r4.24
  circle w10: c144,365 r0.5
  lines w5: 140,382 152,382 ; 142,408 154,408 ; 152,431.1 164,431.1 ; 154,171 166,171 ; 154.2,456.9 166.2,456.9 ; 155,145 167,145 ; 161,206 173,206 ; 162,180 174,180 ; 173,275 185,275 ; 173,300.5 185,300.5 ; 181,218 193,218 ; 181,243 193,243 ; 214.5,94.9 226.5,94.9 ; 215,70.9 227,70.9 ; 246.7,197.8 246.7,209.8 ; 266.5,393.5 278.5,393.5 ; 267,368 279,368 ; 267.5,360.2 279.5,360.2 ; 267.5,391.2 279.5,391.2 ; 268,336.1 280,336.1 ; 268.5,368.2 280.5,368.2 ; 271.7,198.8 271.7,210.8 ; 282,70.4 294,70.4 ; 282.5,94.4 294.5,94.4 ; 296,324.1 308,324.1 ; 297,298.1 309,298.1 ; 362,428 374,428 ; 362,455 374,455 ; 373.25,39.78 384.35,39.78 ; 379.25,32.38 379.25,47.28 ; 403.5,152.9 415.5,152.9 ; 404,127.9 416,127.9 ; 427,429 439,429 ; 429,454 441,454 ; 445.2,213.3 445.2,225.3 ; 467.4,34.32 478,34.32 ; 471.2,213.3 471.2,225.3 ; 484.9,28 484.9,101.6 ; 491.2,34.2 501.8,34.2 ; 516.3,292.4 528.3,292.4 ; 517.3,266.4 529.3,266.4 ; 525,431 537,431 ; 525,455 537,455 ; 526.79,319.02 538.79,319.02 ; 526.78,345.29 538.78,345.29 ; 579.15,307.22 579.15,319.22 ; 593.5,40.2 604.6,40.2 ; 599.5,32.8 599.5,47.7 ; 605.2,305.63 605.2,317.63 ; 610.6,102.5 610.6,42.9 610.8,42.7 ; 611,29 611,43
  text "3" at 108.97,876.63 h25
  text "G" at 133.02,877.11 h25
  text "1.2" at 406.28,874.7 h25
  text "1.8" at 524.16,871.34 h25
  text "C" at 158.52,859.31 h25
  text "D" at 184.02,859.31 h25
  text "G" at 209.27,248.93 h25
  text "DATA" at 364.09,36.39 h25 r90
  text "IMR2-6/18" at 111,31 h25
  text "LED" at 514.25,30.47 h25
Bottom Overlay:
  lines w5: 102.35,529.3 102.35,541.3 ; 128.35,529.3 128.35,541.3 ; 137.35,529.3 137.35,541.3 ; 140,366.2 152,366.2 ; 141.65,498.44 153.65,498.44 ; 142.65,472.28 154.65,472.28 ; 164.35,529.3 164.35,541.3 ; 167,668.9 179,668.9 ; 167.05,758.8 179.05,758.8 ; 167.6,661.75 179.6,661.75 ; 167.9,693.85 179.9,693.85 ; 167.9,799.45 179.9,799.45 ; 168,263 180,263 ; 168,700.3 180,700.3 ; 168.05,733.8 180.05,733.8 ; 168.05,773.8 180.05,773.8 ; 168.05,807.55 180.05,807.55 ; 168.5,832.55 180.5,832.55 ; 168.5,897.05 180.5,897.05 ; 168.65,871.45 180.65,871.45 ; 168.7,839 180.7,839 ; 168.75,635.95 180.75,635.95 ; 168.95,865.65 180.95,865.65 ; 169,289 181,289 ; 169.05,629.8 181.05,629.8 ; 169.1,725.5 181.1,725.5 ; 169.4,603.8 181.4,603.8 ; 173.35,529.3 173.35,541.3 ; 178.52,572.24 190.52,572.24 ; 179,597.5 191,597.5 ; 191.65,436.3 203.65,436.3 ; 191.65,462.3 203.65,462.3 ; 200.35,528.3 200.35,540.3 ; 213.25,773.65 213.25,785.65 ; 229.5,181.5 229.5,193.5 ; 237.05,469.7 237.05,481.7 ; 239.55,773.2 239.55,785.2 ; 256,180.5 256,192.5 ; 263.01,162.46 263.01,174.46 ; 263.4,469.75 263.4,481.75 ; 264.5,804.4 264.5,816.4 ; 269.4,499.3 269.4,511.3 ; 285.22,203.21 297.22,203.21 ; 285.24,162.19 285.24,174.19 ; 285.78,229.88 297.78,229.88 ; 287.5,131 300.5,131 ; 288,105 301,105 ; 290.5,803.5 290.5,815.5 ; 291.5,163.21 291.5,175.21 ; 295,498.9 295,510.9 ; 296.65,677.35 308.65,677.35 ; 296.95,671.5 308.95,671.5 ; 297,702.5 309,702.5 ; 297.85,645.3 309.85,645.3 ; 299,38 318,38 ; 299,98 318,98 ; 299.5,803 299.5,815 ; 302.15,504.25 302.15,516.25 ; 317.75,600.3 317.75,612.3 ; 318.5,162.71 318.5,174.71 ; 324,804 324,816 ; 326.5,183 326.5,195 ; 326.85,503.8 326.85,515.8 ; 334,502.9 334,514.9 ; 342.7,600.5 342.7,612.5 ; 350.45,612.55 350.45,624.55 ; 353,753.2 365,753.2 ; 353.5,182 353.5,194 ; 353.6,727.8 365.6,727.8 ; 358.95,503.6 358.95,515.6 ; 363,181.5 363,193.5 ; 363.65,718.25 375.65,718.25 ; 364.05,656.3 376.05,656.3 ; 364.25,692.6 376.25,692.6 ; 364.95,682.2 376.95,682.2 ; 372.55,41.98 383.65,41.98 ; 376.1,611.65 376.1,623.65 ; 378.55,34.58 378.55,49.48 ; 389.5,183 389.5,195 ; 396.5,182 396.5,194 ; 401.97,152.59 413.97,152.59 ; 402.44,127.65 414.44,127.65 ; 407.05,620.9 419.05,620.9 ; 407.25,646.95 419.25,646.95 ; 422.5,182.5 422.5,194.5 ; 429.5,187.5 429.5,199.5 ; 433.15,813.05 445.15,813.05 ; 434.5,838.9 446.5,838.9 ; 435.6,849.15 447.6,849.15 ; 435.6,874.35 447.6,874.35 ; 455.5,188.5 455.5,200.5 ; 466.4,41 477,41 ; 484.8,162.4 496.8,162.4 ; 485.2,42.6 485.2,102.4 485.8,102.4 486.1,102.7 611,102.7 611,43 610.6,42.6 ; 485.8,188.4 497.8,188.4 ; 485.8,197.4 497.8,197.4 ; 485.8,222.4 497.8,222.4 ; 493.15,786.6 493.15,798.6 ; 509.25,295.4 509.25,307.4 ; 511.1,38.5 521.7,38.5 ; 519.4,787.95 519.4,799.95 ; 525,820 525,832 ; 527.2,744.3 527.2,756.3 ; 534.7,294.9 534.7,306.9 ; 535.35,533.1 547.35,533.1 ; 536.65,507.3 548.65,507.3 ; 550.8,196.4 562.8,196.4 ; 550.8,203.4 562.8,203.4 ; 550.8,229.4 562.8,229.4 ; 551,170 563,170 ; 551.8,138.4 563.8,138.4 ; 552,164 564,164 ; 552.3,820.5 552.3,832.5 ; 553.05,742.5 553.05,754.5 ; 553.35,502.1 565.35,502.1 ; 554.35,477.1 566.35,477.1 ; 555,347 555,359 ; 555.32,897.37 566.42,897.37 ; 561.32,889.97 561.32,904.87 ; 565,722.5 565,734.5 ; 568.8,259.4 580.8,259.4 ; 568.8,266.4 580.8,266.4 ; 568.8,292.4 580.8,292.4 ; 569.8,237.4 581.8,237.4 ; 573.7,435.2 573.7,447.2 ; 581,349 581,361 ; 589,722 589,734 ; 594.05,41.63 605.15,41.63 ; 599.2,433.7 599.2,445.7 ; 600.05,34.23 600.05,49.13
  text "1.2" at 358.66,904.53 h20
  text "1.8" at 472.68,881.44 h25
  text "SCL" at 360.59,839.59 h25 r90
  text "SDA" at 396.26,838.16 h25 r90
  text "3" at 230.36,823.03 h25
  text "G" at 256.55,822.44 h25
  text "IMR2-6/18" at 604.5,544.2 h25
  text "LED" at 580.79,108.18 h25
  text "DATA" at 460.88,101.78 h20
M1 Board Outline:
  lines w0: 62.32,477.95 cw(c62.32,516.98) 23.28,516.98 cw(c63.33,516.98) 63.33,557.03 ; 63.33,477.95 cw(c63.33,438.92) 102.36,438.92 ; 63.5,557.03 ccw(c62.93,596.46) 102.36,596.46 ; 279.53,911.02 ccw(c279.53,949.71) 318.21,949.71 ; 318.21,950.39 cw(c358.27,950.39) 358.27,990.45 cw(c358.27,950.4) 398.32,950.4 ; 397.64,950.39 ccw(c437.01,950.39) 437.01,911.02 ; 614.17,437.42 ccw(c613.01,437.42) 613.84,438.24 cw(c652.86,438.24) 652.86,477.27 ; 614.17,595.72 ccw(c653.54,595.72) 653.54,556.35 ; 653.2,477.27 ccw(c653.2,517.32) 693.25,517.32 ccw(c654.22,517.32) 654.22,556.35 ; 437.01,911.02 ccw(c437.01,911.02) 437.01,911.02 ; 437.01,911.02 ccw(c437.01,911.02) 437.01,911.02
  lines w0.5: 62.32,477.95 63.33,477.95 ; 63.33,557.03 63.67,557.03 ; 102.36,438.58 102.36,261.41 102.36,25 614.17,25 614.17,39.41 614.17,261.42 614.17,437.42 ; 102.36,596.4 102.36,911.02 279.53,911.02 ; 318.21,949.71 318.21,950.39 ; 398.32,949.71 398.32,950.39 ; 614.17,595.72 614.17,911.02 437.01,911.02 ; 652.86,477.27 653.2,477.27 ; 653.54,556.35 654.22,556.35 ; 398.32,950.39 398.32,950.4 ; 437.01,911.02 437.01,911.02 ; 437.01,911.02 437.01,911.02
M2 Board Dimensions:
  lines w10: -77.29,515.58 22.71,516.06 ; -37.39,535.77 22.71,516.06 ; -37.19,495.77 22.71,516.06 ; 22.66,526.06 22.76,506.06 ; 336.37,85.65 356.18,25.59 ; 338.99,928.39 359.18,988.33 ; 346.18,25.62 366.18,25.56 ; 349.18,988.36 369.18,988.3 ; 356.54,141.08 356.18,25.59 ; 358.82,872.85 359.18,988.33 ; 376.37,85.53 356.18,25.59 ; 378.99,928.27 359.18,988.33 ; 694.68,529.3 694.78,509.3 ; 754.63,539.59 694.73,519.3 ; 754.83,499.59 694.73,519.3 ; 794.73,519.78 694.73,519.3
  text "672.028 (mil)" at 3.53,372 h60 r0.28
  text "962.745 (mil)" at 392.56,150.96 h60 r89.82
M5 Assembly Top:
  text "PIN 1" at 139.92,510.29 h10
  text "C40" at 131.14,433.75 h20
  text "C5" at 517.11,432.95 h20
  text "C36" at 344.21,431.71 h20
  text "C6" at 418.13,432.33 h20
  text "PIN 1" at 464.31,407.07 h10 r270
  text "R13" at 122.5,382.5 h20
  text "C45" at 248.77,368.87 h20
  text "PIN 1" at 155.46,359.3 h10
  text "C44" at 249.5,337 h20
  text "C37" at 508.73,322.74 h20
  text "R10" at 277.26,300.96 h20
  text "R12" at 601.72,285.28 h20 r90
  text "C43" at 152.5,277.5 h20
  text "R11" at 497.24,269.09 h20
  text "PIN 1" at 286.5,253.36 h10
  text "PIN 1" at 582.55,226.09 h10 r90
  text "C39" at 161.46,219.42 h20
  text "R8" at 469.16,202.13 h20 r90
  text "C42" at 141.14,183.34 h20
  text "PIN 1" at 196.62,150.29 h10
  text "C46" at 136.3,147.57 h20
  text "R9" at 394.89,129.08 h20
  text "R14" at 197.5,73.5 h20
  text "C43" at 262.5,71.5 h20
M6 Assembly Bottom:
  text "C4" at 156.65,873.95 h20
  text "C57" at 416.1,851.8 h20
  text "C12" at 150.42,841.74 h20
  text "D1" at 588.5,821.5 h20 r90
  text "C18" at 416.71,815.42 h20
  text "C8" at 158.82,808.76 h20
  text "R15" at 548.28,799.05 h20 r90
  text "R1" at 515.54,787.23 h20 r90
  text "C56" at 289.41,785.16 h20 r90
  text "C17" at 320.28,783.51 h20 r90
  text "C48" at 150.73,775.78 h20
  text "C10" at 237.87,753.19 h20 r90
  text "C50" at 148.09,736.27 h20
  text "C16" at 332.68,731.97 h20
  text "C19" at 549.79,726.59 h20 r90
  text "C11" at 153.07,703.29 h20
  text "C58" at 585.6,699.8 h20 r90
  text "C55" at 343,693.5 h20
  text "PIN 1" at 504.09,687.62 h10 r270
  text "C15" at 277.5,678.5 h20
  text "C51" at 150.42,673.88 h20
  text "C14" at 344.25,659.76 h20
  text "C54" at 272.5,646.93 h20
  text "C49" at 147.47,641.84 h20
  text "U2" at 550,627.3 h20 r90
  text "C53" at 389.45,622.55 h20
  text "C9" at 155.25,607.46 h20
  text "C52" at 374.29,592.24 h20 r90
  text "C13" at 338.46,579.84 h20 r90
  text "C7" at 168.47,574.48 h20
  text "C3" at 160.38,520.03 h20 r90
  text "C2" at 125.69,517.23 h20 r90
  text "C47" at 197.56,513.34 h20 r90
  text "R7" at 529.64,509.39 h20
  text "C23" at 355.83,483.11 h20 r90
  text "C22" at 324.69,482.28 h20 r90
  text "C20" at 292.16,478.97 h20 r90
  text "R6" at 542.92,477.57 h20
  text "C1" at 134.09,475.07 h20
  text "C21" at 259.64,453.06 h20 r90
  text "C62" at 172.2,438.35 h20
  text "R5" at 595.03,425.71 h20 r90
  text "PIN 1" at 461.43,409.87 h10
  text "C61" at 145.76,394.95 h20 r90
  text "R4" at 577.24,338.77 h20 r90
  text "L5" at 175.78,328.21 h20
  text "C35" at 530.88,276.38 h20 r90
  text "R3" at 557.94,268.86 h20
  text "C60" at 149.33,265.67 h20
  text "L1" at 564.71,238.8 h20
  text "C59" at 151.67,222.43 h20
  text "C24" at 531.64,207.23 h20
  text "C32" at 265.56,206.48 h20
  text "C28" at 465.5,200.47 h20
  text "C25" at 532.39,173.66 h20
  text "C29" at 463.49,167.9 h20
  text "R17" at 252.01,165.02 h20 r90
  text "C27" at 450.71,165.39 h20 r90
  text "C30" at 350.49,162.15 h20 r90
  text "C33" at 386.32,159.62 h20 r90
  text "C34" at 415.63,160.38 h20 r90
  text "L2" at 283.35,154.62 h20 r90
  text "C26" at 530.38,142.09 h20
  text "C31" at 316.17,141.34 h20 r90
  text "R2" at 392.83,129.56 h20
  text "L4" at 160.33,111.27 h20 r90
  text "R16" at 268.32,108.52 h20
  text "L3" at 293.37,56.91 h20
M10 Fab Notes:
  text "4 Layer board - Vias are tented" at 667,64 h30
M13 Component Bodies Top:
  lines w5: 118.2,467.2 118.7,467.7
Drill Drawing:
  circle w10: c852.89,690.26 r19.06
  lines w10: 833.83,328.14 852.89,337.67 871.95,328.14 862.42,347.2 871.95,366.26 852.89,356.73 833.83,366.26 843.36,347.2 833.83,328.14 ; 833.83,413.9 871.95,413.9 871.95,452.02 833.83,452.02 833.83,413.9 ; 833.83,509.2 843.36,509.2 843.36,499.67 862.42,499.67 862.42,509.2 871.95,509.2 871.95,528.26 862.42,528.26 862.42,537.79 843.36,537.79 843.36,528.26 833.83,528.26 833.83,509.2 ; 833.83,594.96 843.36,594.96 852.89,585.43 862.42,594.96 871.95,594.96 862.42,604.49 871.95,614.02 862.42,614.02 852.89,623.55 843.36,614.02 833.83,614.02 843.36,604.49 833.83,594.96
  lines w15: 798.3,302.41 7003.52,302.41 ; 798.3,731.24 7003.52,731.24 ; 1126.98,216.64 1126.98,817 ; 1467.08,216.64 1467.08,817 ; 2104.41,216.64 2104.41,817 ; 2407.35,216.64 2407.35,817 ; 2840.62,216.64 2840.62,817 ; 3706.58,216.64 3706.58,817 ; 4057.54,216.64 4057.54,817 ; 4497.66,216.64 4497.66,817 ; 4923.5,216.64 4923.5,817 ; 5425.36,216.64 5425.36,817 ; 6201.58,216.64 6201.58,817 ; 798.3,216.64 7003.52,216.64 7003.52,817 798.3,817 798.3,216.64
  text "Symbol" at 849.76,756.96 h41.17
  text "Count" at 1152.71,756.96 h41.17
  text "Hole Size" at 1492.81,756.96 h41.17
  text "Plated" at 2130.14,756.96 h41.17
  text "Hole Type" at 2433.08,756.96 h41.17
  text "Drill Layer Pair" at 2866.35,756.96 h41.17
  text "Via/Pad" at 3732.31,756.96 h41.17
  text "Pad Shape" at 4083.27,756.96 h41.17
  text "Template" at 4523.39,756.96 h41.17
  text "Description" at 4949.23,756.96 h41.17
  text "Hole Tolerance (+)" at 5451.09,756.96 h41.17
  text "Hole Tolerance (-)" at 6227.31,756.96 h41.17
  text "2" at 1152.71,671.2 h34.31
  text "18.00mil (0.457mm)" at 1492.81,671.2 h34.31
  text "PTH" at 2130.14,671.2 h34.31
  text "Round" at 2433.08,671.2 h34.31
  text "Top Layer - Bottom Layer" at 2866.35,671.2 h34.31
  text "Pad" at 3732.31,671.2 h34.31
  text "Rounded" at 4083.27,671.2 h34.31
  text "c76h46" at 4523.39,671.2 h34.31
  text "3" at 1152.71,585.43 h34.31
  text "39.37mil (1.000mm)" at 1492.81,585.43 h34.31
  text "NPTH" at 2130.14,585.43 h34.31
  text "Round" at 2433.08,585.43 h34.31
  text "Top Layer - Bottom Layer" at 2866.35,585.43 h34.31
  text "Pad" at 3732.31,585.43 h34.31
  text "Rounded" at 4083.27,585.43 h34.31
  text "c0hn100" at 4523.39,585.43 h34.31
  text "4" at 1152.71,499.67 h34.31
  text "39.00mil (0.991mm)" at 1492.81,499.67 h34.31
  text "PTH" at 2130.14,499.67 h34.31
  text "Round" at 2433.08,499.67 h34.31
  text "Top Layer - Bottom Layer" at 2866.35,499.67 h34.31
  text "Pad" at 3732.31,499.67 h34.31
  text "Rounded" at 4083.27,499.67 h34.31
  text "c135h99m135" at 4523.39,499.67 h34.31
  text "6" at 1152.71,413.9 h34.31
  text "20.00mil (0.508mm)" at 1492.81,413.9 h34.31
  text "PTH" at 2130.14,413.9 h34.31
  text "Round" at 2433.08,413.9 h34.31
  text "Top Layer - Bottom Layer" at 2866.35,413.9 h34.31
  text "Pad" at 3732.31,413.9 h34.31
  text "Rounded" at 4083.27,413.9 h34.31
  text "c89h51" at 4523.39,413.9 h34.31
  text "97" at 1152.71,328.14 h34.31
  text "6.00mil (0.152mm)" at 1492.81,328.14 h34.31
  text "PTH" at 2130.14,328.14 h34.31
  text "Round" at 2433.08,328.14 h34.31
  text "Top Layer - Bottom Layer" at 2866.35,328.14 h34.31
  text "Via" at 3732.31,328.14 h34.31
  text "Rounded" at 4083.27,328.14 h34.31
  text "(Mixed)" at 4523.39,328.14 h34.31
  text "112 Total" at 1152.71,242.37 h34.31
M17 Board Outline:
  lines w0.5: 102.36,411.02 614.17,411.02 ; 117.36,426.02 600.36,426.02 600.36,891.02 117.36,891.02 117.36,426.02 ; 232.36,531.02 232.36,601.02 232.36,781.02 458.36,781.02 480.36,781.02 480.36,771.02 480.36,591.02 480.36,531.02 232.36,531.02